# Altium PCB PCB1.PCBDOC
Units mil, origin at the board's own origin, x right, y up, seen from the top; angles counter-clockwise.
Board outline 2204.72 x 3503.94 mil, 2 copper layers (Top Layer, Bottom Layer); 28 components, 51 nets, 186 pads, 16 vias.
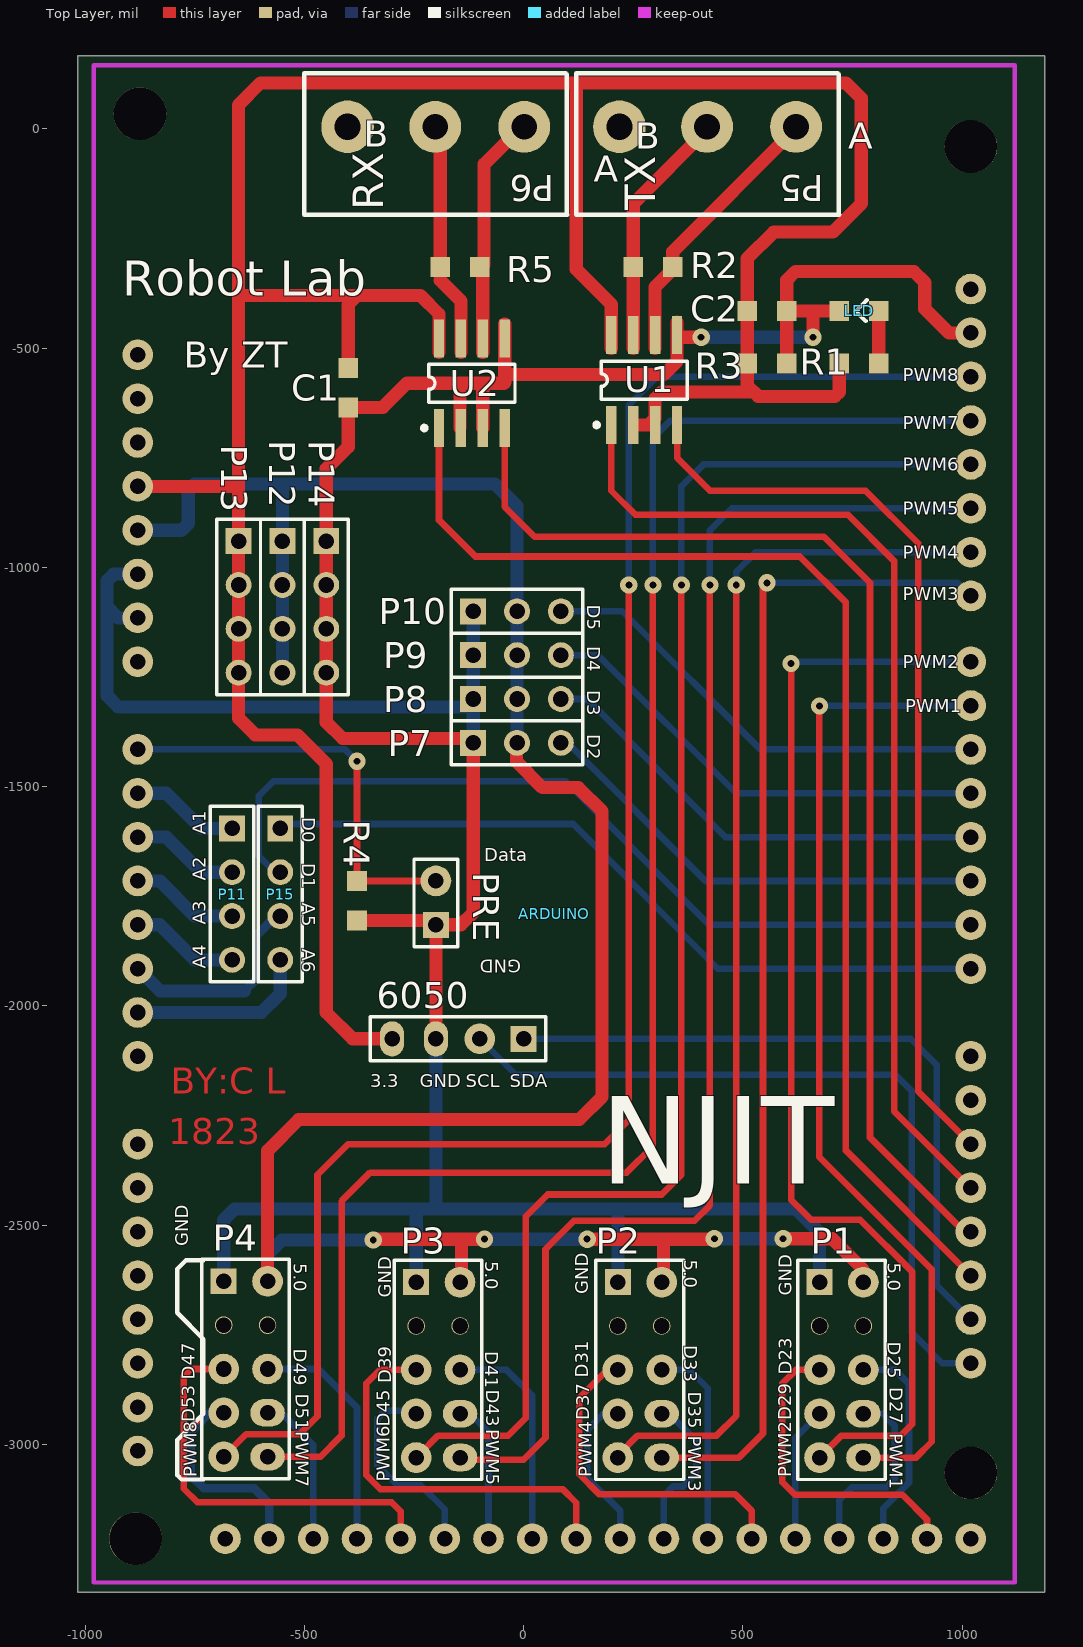
[diagram p0: Top Layer view]
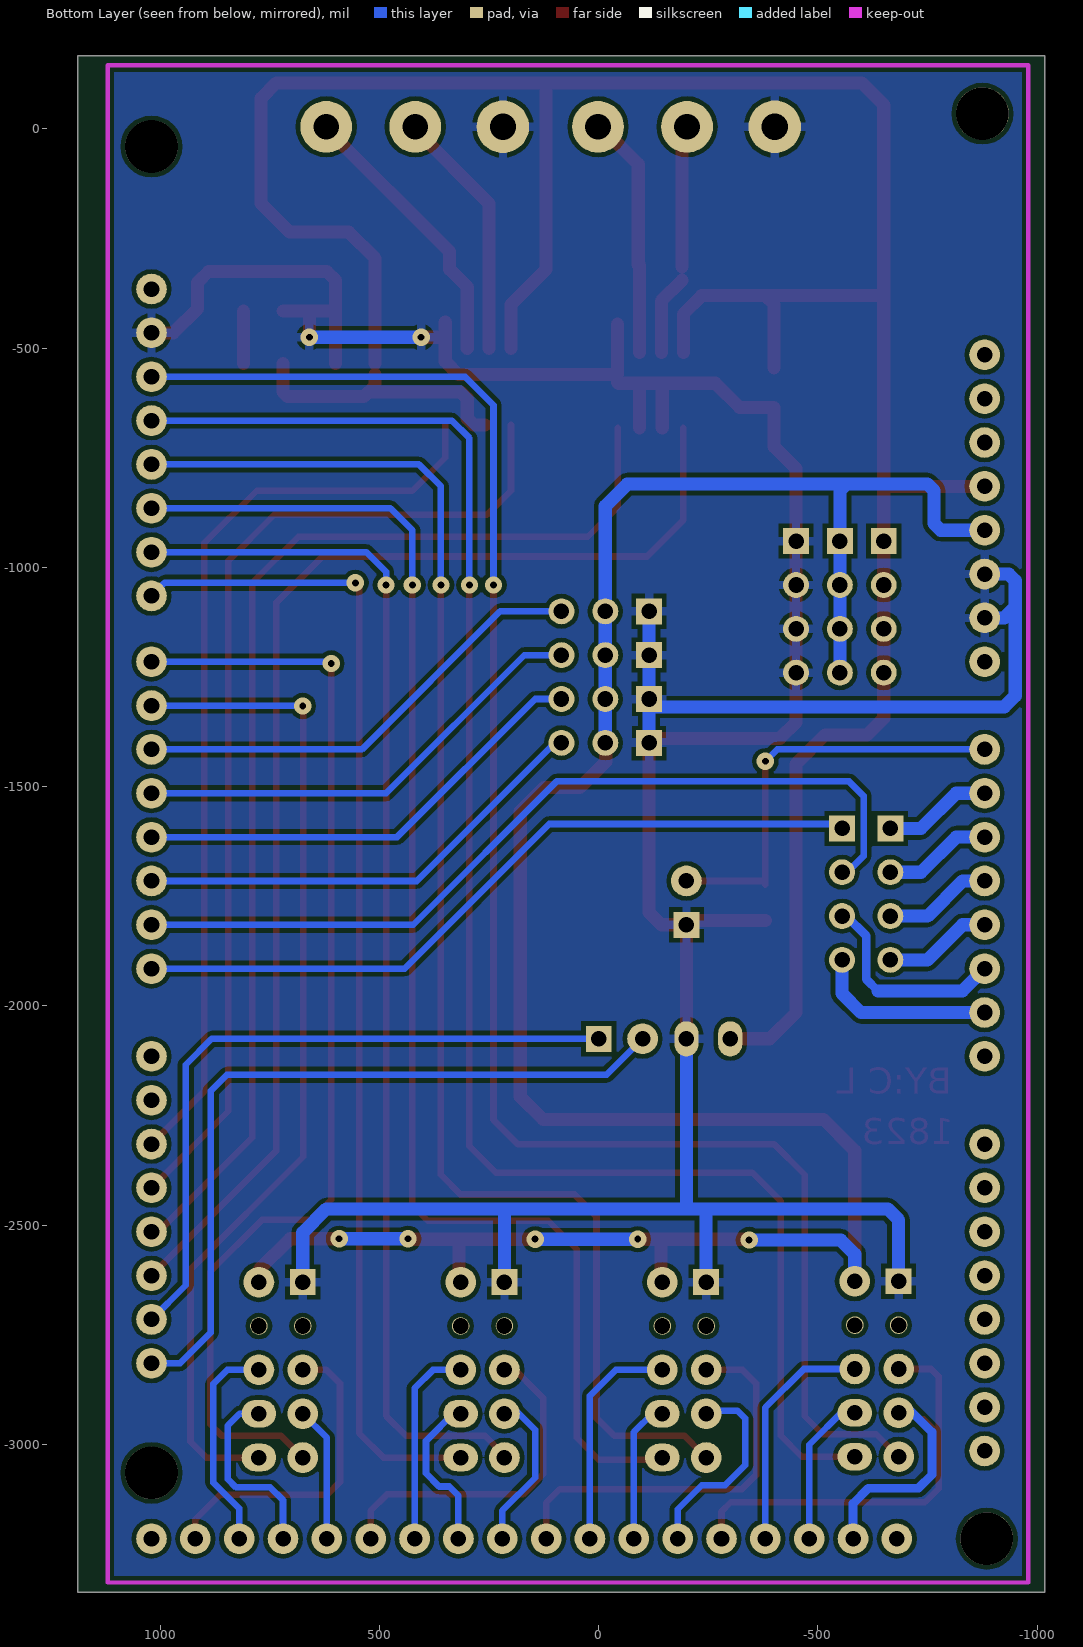
[diagram p1: Bottom Layer view, seen from below]

## Layer stack, top to bottom
Top Layer: signal copper 1.4
Dielectric: dielectric 12.6, FR-4, Dk 4.8
Bottom Layer: signal copper 1.4

## Board outline
-1016.69,-3337.05 -1016.69,166.89 676.22,166.89 1188.03,166.89 1188.03,-463.03 1188.03,-3337.05 715.59,-3337.05

## Design rules (kind name [scope] priority, off if disabled: settings)
Clearance [All] p1: gap=10
ComponentClearance [All] p1: gap=10 collisioncheckmode=3 verticalgap=10
PolygonConnect [All] p1: connectstyle=Relief reliefconductorwidth=20 reliefentries=4 polygonreliefangle="90 Angle"
RoutingVias [All] p1: holewidth=15 width=30 viastyle="Through Hole" minholewidth=15 minwidth=30 maxholewidth=15 maxwidth=30
SolderMaskExpansion [All] p1: expansion=4
TestPointUsage FabricationTestPointUsage [All] p1: valid=0 allowmultiple=FALSE
Testpoint FabricationTestpoint [All] p1: side=3 testpointundercomponent=TRUE minsize=40 maxsize=100 preferedsize=60 minholesize=0 maxholesize=40 preferedholesize=32 testpointgrid=1 style=297 order=0-112345678
Width [All] p1: maxlimit=50 minlimit=15 preferedwidth=30
18 further rules are at their usual default settings.

## Components (designator, comment, footprint, x,y, rotation, side; value= is the part's Value field where it differs from the comment)
6050 "Header 4" HDR1X4#1 0,-2075 r180 top
ARDUINO "2560" ARDUINO -880,-515 r0 top locked
C1 "Cap" 0805 -400,-635 r90 top
C2 "Cap" 0805 600,-415 r180 top
LED "LED0" 0805 810,-415 r180 top
P1 "Header 5X2" HDR2X5 675,-2630 r270 top
P2 "Header 5X2" HDR2X5 215,-2630 r270 top
P3 "Header 5X2" HDR2X5 -245,-2630 r270 top
P4 "Header 5X2" HDR2X5 -684,-2628 r270 top
P5 "Header 2" 蓝色电源插座 520,5 r180 top
P6 "Header 2" 蓝色电源插座 -100,5 r180 top
P7 "Header 3" HDR1X3 -115,-1400 r0 top
P8 "Header 3" HDR1X3 -115,-1300 r0 top
P9 "Header 3" HDR1X3 -115,-1200 r0 top
P10 "Header 3" HDR1X3 -115,-1100 r0 top
P11 "Header 4" HDR1X4#2 -665,-1595 r270 top
P12 "Header 4" HDR1X4#2 -550,-940 r270 top
P13 "Header 4" HDR1X4#2 -650,-940 r270 top
P14 "Header 4" HDR1X4#2 -450,-940 r270 top
P15 "Header 4" HDR1X4#2 -555,-1595 r270 top
PRE "Header 2" HDR1X2 -200,-1815 r90 top
R1 "Res2" 0805 720,-535 r0 top
R2 "Res2" 0805 340,-315 r180 top
R3 "Res2" 0805 510,-535 r0 top
R4 "Res2" 0805 -380,-1715 r270 top
R5 "Res2" 0805 -100,-315 r180 top
U1 "MAX3482" 3485 300,-475 r90 top
U2 "MAX3482" 3485 -93,-482 r90 top

## Footprints (in the part's own frame and the unit in brackets; to place one, negate y for a bottom-side part, rotate by r counter-clockwise, add the part's x,y. Pads: shape width x height; smd on the part's side, far side on the other; paste and mask are expansions set on the pad)
0805 [mil]
  rect 45x45 smd: 1(0,0) 2(90,0)
3485 [mm]
  rect 2.2x0.6 smd: 1(-5.08,2.54) 2(-5.08,1.27) 3(-5.08,0) 4(-5.08,-1.27) 5(0.12,-1.27) 6(0.12,0) 7(0.12,1.27) 8(0.12,2.54)
  silkscreen extent -5.2,-1.87 -1.38,3.51
ARDUINO [mil]
  round 70 hole 35.43: 1(0,0) 2(0,-100) 3(0,-200) 4(0,-300) 5(0,-400) 6(0,-500) 7(0,-600) 8(0,-700) 9(0,-900) 10(0,-1000) 11(0,-1100) 12(0,-1200) 13(0,-1300) 14(0,-1400) 15(0,-1500) 16(0,-1600) 17(0,-1800) 18(0,-1900) 19(0,-2000) 20(0,-2100) 21(0,-2200) 22(0,-2300) 23(0,-2400) 24(0,-2500) 25(200,-2700) 26(300,-2700) 27(400,-2700) 28(500,-2700) 29(600,-2700) 30(700,-2700) 31(800,-2700) 32(900,-2700) 33(1000,-2700) 34(1100,-2700) 35(1200,-2700) 36(1300,-2700) 37(1400,-2700) 38(1500,-2700) 39(1600,-2700) 40(1700,-2700) 41(1800,-2700) 42(1900,-2700) 43(1900,-2300) 44(1900,-2200) 45(1900,-2100) 46(1900,-2000) 47(1900,-1900) 48(1900,-1800) 49(1900,-1700) 50(1900,-1600) 51(1900,-1400) 52(1900,-1300) 53(1900,-1200) 54(1900,-1100) 55(1900,-1000) 56(1900,-900) 57(1900,-800) 58(1900,-700) 59(1900,-550) 60(1900,-450) 61(1900,-350) 62(1900,-250) 63(1900,-150) 64(1900,-50) 65(1900,50) 66(1900,150)
HDR1X2 [mm] "Connector; Header; 2 Position"
  rect 1.5x1.5 hole 0.9: 1(0,0)
  round 1.778 hole 0.9: 2(2.54,0)
  silkscreen extent -1.27,-1.27 3.81,1.27
HDR1X3 [mm] "Connector; Header; 3 Position"
  rect 1.5x1.5 hole 0.9: 1(0,0)
  round 1.5 hole 0.9: 2(2.54,0) 3(5.08,0)
  silkscreen extent -1.27,-1.27 6.35,1.27
HDR1X4#1 [mil] "Connector; Header; 4 Position"
  rect 59.06x59.06 hole 35.43: 1(0,0)
  round 70 hole 35.43: 2(100,0)
  oval 55x80 hole 35.43: 3(200,0) 4(300,0)
  silkscreen extent -50,-50 350,50
HDR1X4#2 [mil] "Connector; Header; 4 Position"
  rect 59.06x59.06 hole 35.43: 1(0,0)
  round 59.06 hole 35.43: 2(100,0) 3(200,0) 4(300,0)
  silkscreen extent -50,-50 350,50
HDR2X5 [mm] "Connector; Header; 5x2 Position"
  rect 1.5x1.5 hole 0.9: 1(0,0)
  round 1.778 hole 0.9: 2(0,2.54) 5(5.08,0) 6(5.08,2.54) 7(7.62,0) 9(10.16,0)
  round 1.016 hole 0.9: 3(2.54,0) 4(2.54,2.54)
  oval 1.6x2 hole 0.9: 8(7.62,2.54) 10(10.16,2.54)
  silkscreen extent -1.27,-1.27 11.43,3.81
蓝色电源插座 [mm]
  round 3 hole 1.5: 1(-2.578,0) 2(2.578,0)
  silkscreen extent -5.07,-3.1 10.16,5.11

## Part data
6050 P11 P12 P13 P14 P15: "Header, 4-Pin"
ARDUINO: library part Component_1
C1 C2: "Capacitor"
LED: "Typical INFRARED GaAs LED"
P1 P2 P3 P4: "Header, 5-Pin, Dual row"
P5 P6 PRE: "Header, 2-Pin"
P7 P8 P9 P10: "Header, 3-Pin"
R1 R2 R3 R4 R5: "Resistor"

## Free pads (board coordinates)
  round 120 hole 60: 0(-401.5,5) 1(218.5,5)
  round 120 hole 120: 67(-885,-3215) 68(1020,-3065) 69(1020,-40) 70(-875,35)

## Via types
v1: diameter 39.37, hole 15.75, Top Layer to Bottom Layer, 16 vias

## Nets (pads, with @x,y where several pads share a name; then routed paths per layer and width w, separated by ;. In a path a pad name is that pad's centre, name@x,y a point inside that pad or via, vN(x,y) a via of type N, cw(c..) or ccw(c..) an arc to the next point about the centre after c; other vN are vias at no path point)
3.3: 6050.4 ARDUINO.4 C1.2 C2.2 P13.1 P13.2 P13.3 P13.4 R1.1 R3.1 U1.2 U1.3 U1.8 U2.8 | length 6851.7
  Top Layer w30: ARDUINO.4 -650,-815 ; -640,-380 -235,-380 -193,-422 U2.8@-193,-510 ; C1.2 -400,-400 -380,-380 ; 6050.4 -390,-2075 -450,-2015 -450,-1448 -516,-1382 -612,-1382 -650,-1344 -650,55 -600,105 735,105 770,70 770,-170 705,-235 570,-235 510,-295 R3.1 ; 120,105 120,-320 200,-400 U1.8@200,-500 ; U1.2@260,-675 285,-675 300,-660 300,-615 315,-600 515,-600 ; 510,-560 510,-585 535,-610 710,-610 720,-600 R1.1
5.0: ARDUINO.5 P1.2 P2.2 P3.2 P4.2 P7.2 P8.2 P9.2 P10.2 P12.1 P12.2 P12.3 P12.4 | length 5641.6
  Top Layer w30: P4.2 -584,-2330 -513,-2259 127,-2259 179,-2207 179,-1556 125,-1502 43,-1502 -16,-1443 P7.2@-16,-1408 ; v1(-343,-2534) -341,-2532 v1(-89,-2532) ; P3.2@-142,-2627 -142,-2532 ; v1(145,-2532) 434,-2532 v1(435,-2531) ; P2.2@319,-2626 319,-2532 ; v1(592,-2531) 704,-2531 P1.2@774,-2601
  Bottom Layer w30: ARDUINO.5 -780,-915 -765,-900 -765,-825 -750,-810 -65,-810 -15,-860 P7.2 ; P4.2 -584,-2566 -552,-2534 v1(-343,-2534) ; -565,-810 -550,-825 P12.4 ; v1(-89,-2532) v1(145,-2532) ; v1(435,-2531) v1(592,-2531)
A0: ARDUINO.9 PRE.2 R4.1 | length 967.7
  Top Layer w15: R4.1@-380,-1724 v1(-380,-1442) ; R4.1 -214,-1715 PRE.2@-208,-1709
  Bottom Layer w15: ARDUINO.9 -407,-1415 v1(-380,-1442)
A1: ARDUINO.10 P11.1 | length 248.1
  Bottom Layer w30: ARDUINO.10 -815,-1515 -735,-1595 P11.1
A2: ARDUINO.11 P11.2 | length 248.1
  Bottom Layer w30: ARDUINO.11 -815,-1615 -735,-1695 P11.2
A3: ARDUINO.12 P11.3 | length 248.1
  Bottom Layer w30: ARDUINO.12 -830,-1715 -750,-1795 P11.3
A4: ARDUINO.13 P11.4 | length 248.1
  Bottom Layer w30: ARDUINO.13 -830,-1815 -750,-1895 P11.4
A5: ARDUINO.14 P15.3 | length 466.4
  Bottom Layer w20: -637,-1966 -610,-1939 -610,-1840 P15.3@-564,-1794
  Bottom Layer w30: ARDUINO.14 -829,-1966 -637,-1966
A6: ARDUINO.15 P15.4 | length 419.8
  Bottom Layer w30: ARDUINO.15 -598,-2015 -555,-1972 P15.4
D0: ARDUINO.51 P15.1 | length 1704.7
  Bottom Layer w15: P15.1@-548,-1585 113,-1585 443,-1915 ARDUINO.51
D1: ARDUINO.52 P15.2 | length 1965.3
  Bottom Layer w15: P15.2@-565,-1697 -604,-1658 -604,-1521 -571,-1488 96,-1488 423,-1815 ARDUINO.52
D23: ARDUINO.41 P1.5 | length 732
  Top Layer w15: P1.5 621,-2830 590,-2861 590,-3086 619,-3115 864,-3115 920,-3171 ARDUINO.41
D25: ARDUINO.40 P1.6 | length 494.7
  Bottom Layer w15: P1.6 847,-2830 879,-2862 879,-3087 820,-3146 ARDUINO.40
D27: ARDUINO.39 P1.8 | length 438.1
  Bottom Layer w15: ARDUINO.39 720,-3127 749,-3098 827,-3098 846,-3079 846,-2957 819,-2930 P1.8
D29: ARDUINO.38 P1.7 | length 307.8
  Bottom Layer w15: ARDUINO.38 620,-2985 P1.7
D31: ARDUINO.37 P2.5 | length 777.1
  Top Layer w15: P2.5@206,-2815 127,-2894 127,-3068 173,-3114 483,-3114 520,-3151 ARDUINO.37
D33: ARDUINO.36 P2.6 | length 465.4
  Bottom Layer w15: P2.6 378,-2830 420,-2872 ARDUINO.36
D35: ARDUINO.35 P2.8 | length 363.3
  Bottom Layer w15: ARDUINO.35 320,-3117 341,-3096 364,-3096 394,-3066 394,-2992 P2.8@326,-2924
D37: ARDUINO.34 P2.7 | length 348.4
  Bottom Layer w15: P2.7@194,-2918 145,-2967 145,-3076 220,-3151 ARDUINO.34
D39: ARDUINO.33 P3.5 | length 922.9
  Top Layer w15: P3.5 -328,-2830 -359,-2861 -359,-3070 -327,-3102 89,-3102 120,-3133 ARDUINO.33
D41: ARDUINO.32 P3.6 | length 515.4
  Bottom Layer w15: P3.6 -39,-2830 20,-2889 ARDUINO.32
D43: ARDUINO.31 P3.8 | length 303.8
  Bottom Layer w15: P3.8@-123,-2929 -80,-2972 ARDUINO.31
D45: ARDUINO.30 P3.7 | length 460.3
  Bottom Layer w15: P3.7@-250,-2923 -316,-2923 -334,-2941 -334,-3047 -288,-3093 -235,-3093 -180,-3148 ARDUINO.30
D47: ARDUINO.29 P4.5 | length 959.5
  Top Layer w15: -760,-2962 -741,-2943 ; P4.5 -758,-2828 -775,-2845 -775,-3101 -744,-3132 -301,-3132 -280,-3153 ARDUINO.29
D49: ARDUINO.28 P4.6 | length 539.5
  Bottom Layer w15: P4.6 -468,-2828 -380,-2916 ARDUINO.28
D51: ARDUINO.27 P4.8 | length 324.3
  Bottom Layer w15: P4.8@-558,-2923 -480,-3001 ARDUINO.27
D53: ARDUINO.26 P4.7 | length 462.1
  Bottom Layer w20: P4.7@-705,-2917 -760,-2972 -760,-3069 -729,-3100 -615,-3100 -580,-3135 ARDUINO.26
GND: 6050.3 ARDUINO.6 ARDUINO.7 ARDUINO.65 C1.1 C2.1 LED.2 P1.1 P2.1 P3.1 P4.1 P7.1 P8.1 P9.1 P10.1 P14.1 P14.2 P14.3 P14.4 pad.0 pad.1 PRE.1 R3.2 R4.2 U1.5 U2.2 U2.3 U2.5 | length 8325.4
  Top Layer w30: R4.2 PRE.1@-204,-1805 ; 6050.3 PRE.1 -143,-1815 -115,-1787 P7.1 ; U2.2@-145,-682 -145,-580 ; P7.1@-115,-1390 -413,-1390 -450,-1353 -450,-775 -400,-725 C1.1 -321,-635 -266,-580 -45,-580 -43,-578 ; U2.3 -93,-582 ; U2.5@-43,-445 -43,-560 320,-560 350,-530 U1.5@350,-440 ; U1.5@350,-475 v1(405,-475) ; R3.2 600,-345 620,-325 890,-325 915,-350 915,-410 970,-465 ARDUINO.65 ; C2.1 LED.2 ; v1(660,-475) 660,-415
  Bottom Layer w30: -950,-1090 -925,-1115 ARDUINO.7 ; ARDUINO.6 -935,-1015 -950,-1030 -950,-1293 -925,-1318 P8.1@-115,-1318 ; P4.1 -684,-2488 -659,-2463 621,-2463 675,-2517 P1.1 ; P3.1 -245,-2470 ; -204,-2463 -200,-2459 6050.3 ; P7.1 P10.1 ; P2.1 215,-2467 ; v1(405,-475) v1(660,-475)
NetLED_1: LED.1 R1.2 | length 120
  Top Layer w30: R1.2 LED.1
NetP5_1: P5.1 R2.1 U1.6 | length 637.5
  Top Layer w30: U1.6@300,-500 300,-360 340,-320 340,-280 P5.1@620,0 ; P5.1@621.5,0 P5.1
NetP5_2: P5.2 R2.2 U1.7 | length 570.4
  Top Layer w30: U1.7@250,-500 250,-170 P5.2@420,0
NetP6_1: P6.1 R5.1 U2.6 | length 557.3
  Top Layer w30: U2.6@-93,-510 R5.1@-93,-310 ; R5.1@-90,-310 -90,-80 P6.1@0,10
NetP6_2: P6.2 R5.2 U2.7 | length 501.5
  Top Layer w30: P6.2@-195,0 -190,-5 R5.2 ; -190,-345 -143,-392 U2.7@-143,-510
PWM1: ARDUINO.57 P1.10 | length 2292.4
  Top Layer w15: v1@674,-1325 674,-2344 931,-2601 931,-2994 895,-3030 P1.10
  Bottom Layer w15: v1@674,-1315 ARDUINO.57
  other v1: 675,-1316
PWM2: ARDUINO.58 P1.9 | length 2568.4
  Top Layer w15: v1(610,-1219) 610,-2442 656,-2488 768,-2488 886,-2606 886,-2954 860,-2980 725,-2980 P1.9
  Bottom Layer w15: v1@609,-1215 ARDUINO.58
PWM3: ARDUINO.59 P2.10 | length 2674.9
  Top Layer w15: P2.10 491,-3030 546,-2975 546,-1044 v1(555,-1035)
  Bottom Layer w15: v1(555,-1035) 990,-1035 ARDUINO.59
PWM4: ARDUINO.60 P2.9 | length 2778.8
  Top Layer w15: P2.9@220,-3020 260,-2980 440,-2980 485,-2935 v1(485,-1040)
  Bottom Layer w15: v1(485,-1040) 485,-1010 530,-965 ARDUINO.60
PWM5: ARDUINO.61 P3.10 | length 3219.9
  Top Layer w15: P3.10 -140,-3035 0,-3035 50,-2985 50,-2555 115,-2490 390,-2490 425,-2455 v1(425,-1040)
  Bottom Layer w15: v1(425,-1040) 425,-915 475,-865 ARDUINO.61
PWM6: ARDUINO.62 P3.9 | length 3378.2
  Top Layer w15: P3.9@-235,-3020 -195,-2980 -35,-2980 5,-2940 5,-2480 55,-2430 315,-2430 360,-2385 v1(360,-1040)
  Bottom Layer w15: v1(360,-1040) 360,-815 410,-765 ARDUINO.62
PWM7: ARDUINO.63 P4.10 | length 3842.2
  Top Layer w15: P4.10 -463,-3028 -415,-2980 -415,-2445 -350,-2380 235,-2380 295,-2320 v1(295,-1040)
  Bottom Layer w15: v1(295,-1040) 295,-705 335,-665 ARDUINO.63
PWM8: ARDUINO.64 P4.9 | length 4001.8
  Top Layer w15: P4.9 -633,-2977 -511,-2977 -470,-2936 -470,-2385 -400,-2315 185,-2315 240,-2260 v1(240,-1040)
  Bottom Layer w15: v1(240,-1040) 240,-630 305,-565 ARDUINO.64
RX1: ARDUINO.45 U2.1 | length 2868.9
  Top Layer w15: U2.1 -193,-892 -110,-975 630,-975 735,-1080 735,-2330 ARDUINO.45
RX2: ARDUINO.47 U1.1 | length 2363.8
  Top Layer w15: U1.1 200,-825 255,-880 740,-880 845,-985 845,-2240 ARDUINO.47
SCL: 6050.2 ARDUINO.43 | length 1749.3
  Bottom Layer w15: 6050.2 -18,-2157 848,-2157 885,-2194 885,-2745 955,-2815 ARDUINO.43
SDA: 6050.1 ARDUINO.44 | length 1579.7
  Bottom Layer w15: 6050.1 883,-2075 942,-2134 942,-2637 ARDUINO.44
SERVO1: ARDUINO.53 P7.3 | length 1065.5
  Bottom Layer w15: P7.3 100,-1400 415,-1715 ARDUINO.53
SERVO2: ARDUINO.54 P8.3 | length 1065.5
  Bottom Layer w15: P8.3 145,-1300 460,-1615 ARDUINO.54
SERVO3: ARDUINO.55 P9.3 | length 1065.5
  Bottom Layer w15: P9.3 170,-1200 485,-1515 ARDUINO.55
SERVO4: ARDUINO.56 P10.3 | length 1065.5
  Bottom Layer w15: P10.3 225,-1100 540,-1415 ARDUINO.56
TX1: ARDUINO.46 U2.4 | length 2660.8
  Top Layer w15: U2.4 -43,-862 25,-930 685,-930 790,-1035 790,-2300 ARDUINO.46@1010,-2520
TX2: ARDUINO.48 U1.4 | length 2125.5
  Top Layer w15: U1.4 350,-750 425,-825 780,-825 900,-945 900,-2195 ARDUINO.48
pads on no net: ARDUINO.1 ARDUINO.2 ARDUINO.3 ARDUINO.8 ARDUINO.16 ARDUINO.17 ARDUINO.18 ARDUINO.19 ARDUINO.20 ARDUINO.21 ARDUINO.22 ARDUINO.23 ARDUINO.24 ARDUINO.25 ARDUINO.42 ARDUINO.49 ARDUINO.50 ARDUINO.66 P1.3 P1.4 P2.3 P2.4 P3.3 P3.4 P4.3 P4.4
copper on no net: | length 7.1
  Bottom Layer w20: -930,-3210 -925,-3215

## Polygon pours and split planes (outlines as drawn)
GND on Bottom Layer "Bottom Layer-No Net" (solid, remove dead copper, pour order 1000): -980,140 -970,130 -970,-3310 1130,-3310 1110,-3290 1110,150 -950,150 -970,130

## Keep-outs
Keep-Out Layer:
  lines w10: -980,-3315 1120,-3315 1120,145 -980,145 -980,-3315

## Other copper
Top Layer:
  text "BY:C L" at -805,-2200 h60
  text "1823" at -810,-2315 h60

## Silkscreen, mask and mechanical layers (free items; w line width, h text height)
Top Overlay:
  lines w10: -730,-3080 -780,-3080 -790,-3070 -790,-2990 -730,-2930 -730,-2760 -790,-2700 -790,-2600 -770,-2580 -730,-2580 ; 780,-438 758,-416 757,-416 783,-390
  text "B" at -365,-40 h60
  text "B" at 255,-45 h60
  text "A" at 740,-45 h60
  text "A" at 160,-120 h60
  text "RX" at -320,-185 h70 r90
  text "TX" at 300,-185 h70 r90
  text "Robot Lab" at -915,-380 h80
  text "By ZT" at -775,-545 h60
  text "PWM8" at 865,-575 h30
  text "PWM7" at 865,-685 h30
  text "PWM6" at 865,-780 h30
  text "PWM5" at 865,-880 h30
  text "PWM4" at 865,-980 h30
  text "PWM3" at 865,-1075 h30
  text "D5" at 145,-1085 h30 r270
  text "D4" at 145,-1180 h30 r270
  text "PWM2" at 865,-1230 h30
  text "D3" at 145,-1280 h30 r270
  text "PWM1" at 870,-1330 h30
  text "D2" at 145,-1380 h30 r270
  text "D0" at -505,-1570 h30 r270
  text "A1" at -725,-1610 h30 r90
  text "Data" at -90,-1670 h30
  text "D1" at -505,-1675 h30 r270
  text "A2" at -725,-1715 h30 r90
  text "A5" at -505,-1765 h30 r270
  text "A3" at -725,-1815 h30 r90
  text "A6" at -505,-1870 h30 r270
  text "GND" at -5,-1895 h30 r180
  text "A4" at -725,-1915 h30 r90
  text "3.3" at -350,-2186 h30
  text "GND" at -237,-2186 h30
  text "SCL" at -132,-2186 h30
  text "SDA" at -32,-2186 h30
  text "NJIT" at 175,-2406 h200
  text "GND" at -765,-2548 h30 r90
  text "5.0" at 366,-2579 h30 r270
  text "5.0" at -87,-2582 h30 r270
  text "5.0" at 831,-2586 h30 r270
  text "5.0" at -524,-2587 h30 r270
  text "GND" at 147,-2658 h30 r90
  text "GND" at 612,-2661 h30 r90
  text "GND" at -302,-2665 h30 r90
  text "D25" at 831,-2766 h30 r270
  text "D33" at 366,-2774 h30 r270
  text "D49" at -524,-2782 h30 r270
  text "D41" at -87,-2787 h30 r270
  text "D23" at 612,-2841 h30 r90
  text "D31" at 147,-2848 h30 r90
  text "D47" at -750,-2853 h30 r90
  text "D39" at -302,-2860 h30 r90
  text "D27" at 835,-2870 h30 r270
  text "D43" at -85,-2875 h30 r270
  text "D35" at 375,-2880 h30 r270
  text "D51" at -520,-2885 h30 r270
  text "D37" at 150,-2945 h30 r90
  text "D29" at 610,-2945 h30 r90
  text "D53" at -750,-2950 h30 r90
  text "D45" at -305,-2960 h30 r90
  text "PWM5" at -85,-2965 h30 r270
  text "PWM7" at -520,-2970 h30 r270
  text "PWM1" at 835,-2975 h30 r270
  text "PWM3" at 375,-2980 h30 r270
  text "PWM8" at -745,-3075 h30 r90
  text "PWM4" at 155,-3075 h30 r90
  text "PWM2" at 610,-3075 h30 r90
  text "PWM6" at -305,-3085 h30 r90
Top Solder:
  text "BY:C L" at -805,-2200 h60
  text "1823" at -810,-2315 h60